# EAGLE board Cellphone-Detector-LM358-Flip-Flop-2X (EAGLE 7.2.0)
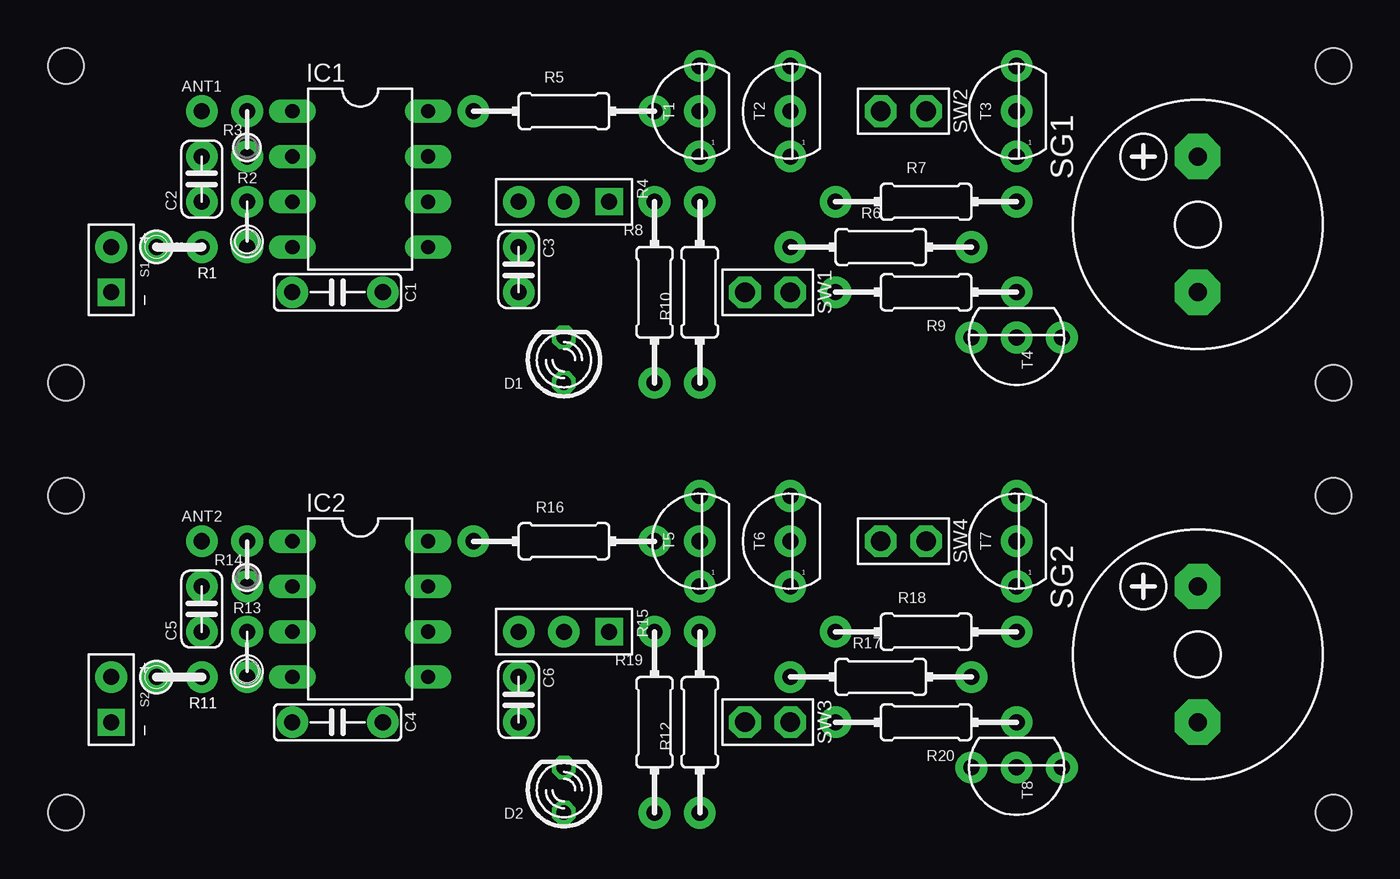
[diagram p0: board, top side]
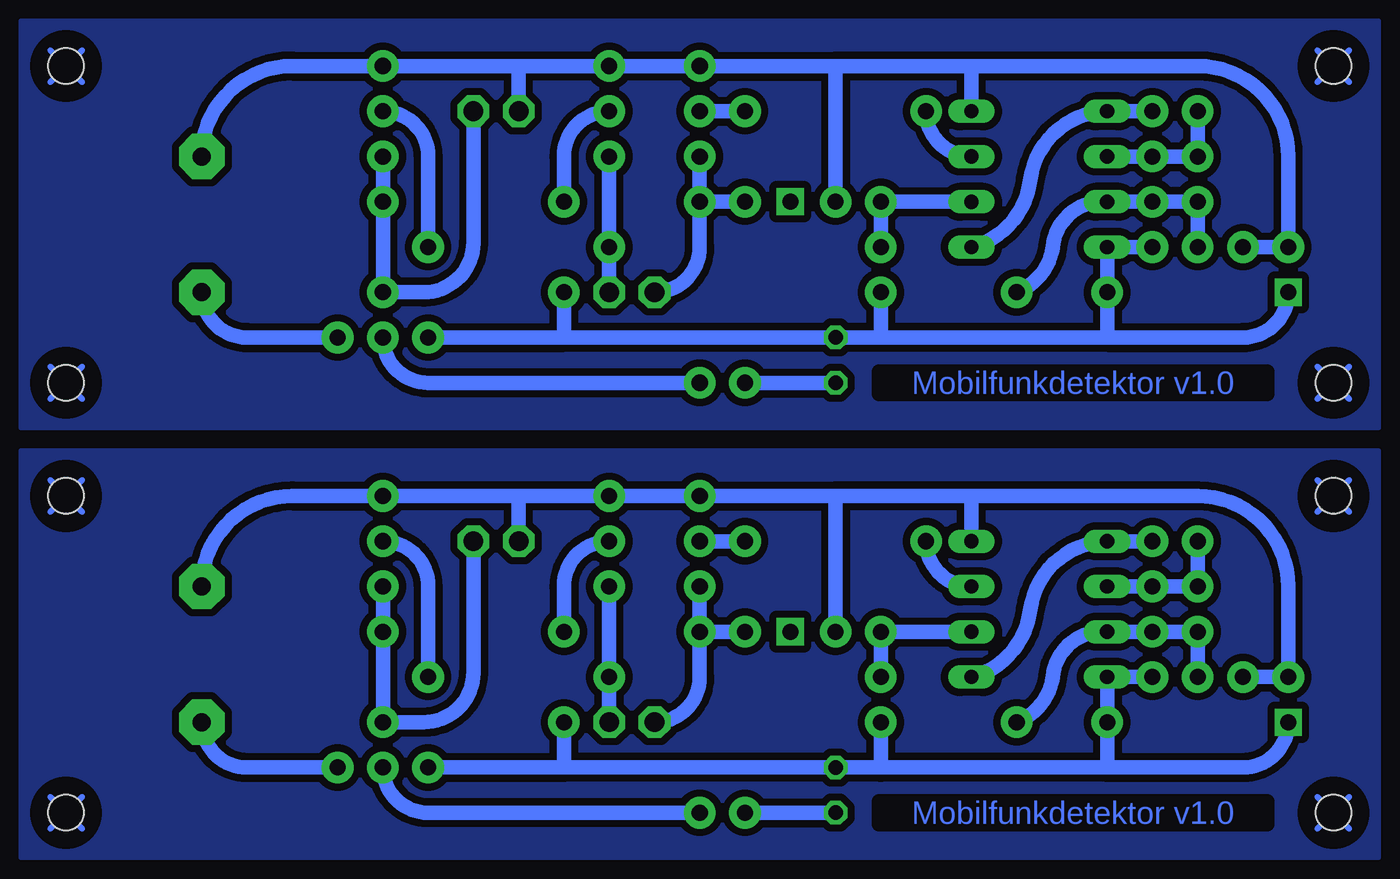
[diagram p1: board, bottom side, seen from below]

No outline drawn. Coordinates in mm, seen from the top.
Copper layers (1*16): Top 0.035mm / dielectric 1.5mm / Bottom 0.035mm
Design rules "default": minimum track width 10mil, minimum drill 24mil, track to track 8mil, track to pad 8mil, pad to pad 8mil, via to via 8mil, smd to smd 8mil, copper to edge 40mil, drill to drill 8mil, minimum pad ring 10mil, minimum via ring 8mil, stop-mask expansion 4mil, vias tented up to drill 0mil, thermal gap 10mil
Net classes: 0 default: clearance 0.406 mm
Holes 2 mm at 2.54,20.32 2.54,2.54 73.66,20.32 73.66,2.54 2.54,-3.81 2.54,-21.59 73.66,-3.81 73.66,-21.59

## Footprints (pad centres in the part's own frame; a part is rotated, then mirrored left to right if it is on the bottom)
SPAD = drill 0.9 pad 1.778: 1 0,0
C050-025X060 = drill 0.9 pad 1.778: 1 0,2.54; 2 0,-2.54
C025-024X044 = drill 0.9 pad 1.778: 1 -1.27,0; 2 1.27,0
LED_3MM/V = drill 0.813 pad 1.27 octagon: A 0,1.27; K 0,-1.27
DIL08 = drill 0.8 pad 1.27 long: 1 -3.81,3.81; 2 -3.81,1.27; 3 -3.81,-1.27; 4 -3.81,-3.81; 5 3.81,-3.81; 6 3.81,-1.27; 7 3.81,1.27; 8 3.81,3.81
0204/2 = drill 0.9 pad 1.778: 1 1.27,0; 2 -1.27,0
0204/2V = drill 0.9 pad 1.778: 1 0,1.27; 2 0,-1.27
0202/2V = drill 0.9 pad 1.778: 1 0,-1.27; 2 0,1.27
CONN-3P = drill 0.9 pad 1.524 square: 1 0,2.54 | drill 0.9 pad 1.778: 2 0,0; 3 0,-2.54
0204/10 = drill 0.9 pad 1.778: 1 -5.08,0; 2 5.08,0
0204/10-V = drill 0.9 pad 1.778: 1 0,5.08; 2 0,-5.08
SPAD+- = drill 0.9 pad 1.524 square: 1 0,-1.27 | drill 0.9 pad 1.778: 2 0,1.27
F/CM12P = drill 1.016 pad 2.54 octagon: + 3.81,0; - -3.81,0
SLSW-1P1T = drill 1.1 pad 1.778 octagon: P 0,0; S 0,-2.54
TO92 = drill 0.9 pad 1.778: 1 0,2.54; 2 0,0; 3 0,-2.54
TO92-CBE = drill 0.9 pad 1.778: 1 0,2.54; 2 0,0; 3 0,-2.54

## Placement (x,y rotation side)
ANT1  ANT  [SPAD]  10.16,17.78 270 top
ANT2  ANT  [SPAD]  10.16,-6.35 270 top
C1  100nF  [C050-025X060]  17.78,7.62 270 top
C2  100nF  [C025-024X044]  10.16,13.97 90 top
C3  100nF  [C025-024X044]  27.94,8.89 270 top
C4  100nF  [C050-025X060]  17.78,-16.51 270 top
C5  100nF  [C025-024X044]  10.16,-10.16 90 top
C6  100nF  [C025-024X044]  27.94,-15.24 270 top
D1  LED rot  [LED_3MM/V]  30.48,3.81 180 top
D2  LED rot  [LED_3MM/V]  30.48,-20.32 180 top
IC1  LM358N  [DIL08]  19.05,13.97 0 top
IC2  LM358N  [DIL08]  19.05,-10.16 0 top
R1  6.8MΩ  [0204/2]  8.89,10.16 180 top
R2  6.8MΩ  [0204/2V]  12.7,11.43 0 top
R3  6.8MΩ  [0202/2V]  12.7,16.51 0 top
R4  470kΩ  [CONN-3P]  30.48,12.7 270 top
R5  10kΩ  [0204/10]  30.48,17.78 0 top
R6  22kΩ  [0204/10]  48.26,10.16 0 top
R7  22kΩ  [0204/10]  50.8,12.7 0 top
R8  470Ω  [0204/10-V]  35.56,7.62 0 top
R9  1kΩ  [0204/10]  50.8,7.62 180 top
R10  10kΩ  [0204/10]  38.1,7.62 90 top
R11  6.8MΩ  [0204/2]  8.89,-13.97 180 top
R12  10kΩ  [0204/10]  38.1,-16.51 90 top
R13  6.8MΩ  [0204/2V]  12.7,-12.7 0 top
R14  6.8MΩ  [0202/2V]  12.7,-7.62 0 top
R15  470kΩ  [CONN-3P]  30.48,-11.43 270 top
R16  10kΩ  [0204/10]  30.48,-6.35 0 top
R17  22kΩ  [0204/10]  48.26,-13.97 0 top
R18  22kΩ  [0204/10]  50.8,-11.43 0 top
R19  470Ω  [0204/10-V]  35.56,-16.51 0 top
R20  1kΩ  [0204/10]  50.8,-16.51 180 top
S1  VCC_GNDR  [SPAD+-]  5.08,8.89 0 top
S2  VCC_GNDR  [SPAD+-]  5.08,-15.24 0 top
SG1  F/CM12P  [F/CM12P]  66.04,11.43 90 top
SG2  F/CM12P  [F/CM12P]  66.04,-12.7 90 top
SW1  SW1  [SLSW-1P1T]  43.18,7.62 270 top
SW2  PB-1P-1T-2P  [SLSW-1P1T]  50.8,17.78 270 top
SW3  SW1  [SLSW-1P1T]  43.18,-16.51 270 top
SW4  PB-1P-1T-2P  [SLSW-1P1T]  50.8,-6.35 270 top
T1  BC327  [TO92]  38.1,17.78 180 top
T2  BC327  [TO92]  43.18,17.78 180 top
T3  BC327  [TO92]  55.88,17.78 180 top
T4  BC337CBE  [TO92-CBE]  55.88,5.08 270 top
T5  BC327  [TO92]  38.1,-6.35 180 top
T6  BC327  [TO92]  43.18,-6.35 180 top
T7  BC327  [TO92]  55.88,-6.35 180 top
T8  BC337CBE  [TO92-CBE]  55.88,-19.05 270 top

## Library data of the parts
ANT1 ANT2 S1 S2 = pad
C1-C6 = c
D1 D2 = d
IC1 IC2 = ic
R1-R20 = r
SG1 SG2 = buzzer; OC_FARNELL: unknown; OC_NEWARK: unknown
SW1-SW4 = sw
T1-T8 = t

## Nets
ANT: ANT1.1 C2.2 IC1.2 R3.1
ANT1: ANT2.1 C5.2 IC2.2 R14.1
GND: C1.2 C3.2 D1.K IC1.4 R2.2 R9.2 S1.1 T4.3
GND1: C4.2 C6.2 D2.K IC2.4 R13.2 R20.2 S2.1 T8.3
N$1: C3.1 IC1.6 R4.3
N$2: SG1.- T4.1
N$3: IC1.7 R5.1
N$4: C1.1 C2.1 IC1.3 R1.2 R2.1
N$5: R7.2 R9.1 SW2.P T3.1
N$6: R6.1 SW1.P T2.1
N$7: R6.2 T3.2
N$8: R10.1 T4.2
N$9: R7.1 T2.2
N$12: D1.A R8.2
N$13: R8.1 R10.2 SW1.S T1.1
N$14: R5.2 T1.2
N$22: C6.1 IC2.6 R15.3
N$23: C4.1 C5.1 IC2.3 R11.2 R13.1
N$24: R17.1 SW3.P T6.1
N$25: R17.2 T7.2
N$26: R18.1 T6.2
N$27: D2.A R19.2
N$28: IC2.7 R16.1
N$29: R16.2 T5.2
N$30: R12.2 R19.1 SW3.S T5.1
N$31: R12.1 T8.2
N$32: SG2.- T8.1
N$33: R18.2 R20.1 SW4.P T7.1
SIG: IC1.1 IC1.5 R3.2
SIG1: IC2.1 IC2.5 R14.2
VCC: IC1.8 R1.1 R4.2 S1.2 SG1.+ SW2.S T1.3 T2.3 T3.3
VCC1: IC2.8 R11.1 R15.2 S2.2 SG2.+ SW4.S T5.3 T6.3 T7.3

## Tracks (layer width: path | path; a pad name or v marks a point on that pad's centre or on a via)
ANT
  Bottom 0.813: IC1.2 R3.1 C2.2 ANT1.1
ANT1
  Bottom 0.813: IC2.2 R14.1 C5.2 ANT2.1
GND
  Bottom 0.813: R2.2 IC1.4 C1.2 15.24,5.08 | 15.24,5.08 27.94,5.08 | 27.94,5.08 C3.2 | 27.94,5.08 D1.K 45.72,5.08 | T4.3 45.72,5.08 | 45.72,5.08 R9.2 | 15.24,5.08 7.62,5.08 arc-90 S1.1
GND1
  Bottom 0.813: R13.2 IC2.4 C4.2 15.24,-19.05 | 15.24,-19.05 27.94,-19.05 | 27.94,-19.05 C6.2 | 27.94,-19.05 D2.K 45.72,-19.05 | T8.3 45.72,-19.05 | 45.72,-19.05 R20.2 | 15.24,-19.05 7.62,-19.05 arc-90 S2.1
N$1
  Bottom 0.813: C3.1 R4.3 IC1.6
N$2
  Bottom 0.813: T4.1 63.5,5.08 arc90 SG1.-
N$3
  Bottom 0.813: IC1.7 arc90 R5.1
N$4
  Bottom 0.813: R1.2 C2.1 R2.1 IC1.3 arc-90 18.29,10.16 arc60 C1.1
N$5
  Bottom 0.813: T3.1 R7.2 R9.1 53.59,7.62 arc-90 50.8,10.41 SW2.P
N$6
  Bottom 0.813: T2.1 SW1.P R6.1
N$7
  Bottom 0.813: R6.2 53.34,15.24 arc-90 T3.2
N$8
  Bottom 0.813: R10.1 53.34,2.54 arc90 T4.2
N$9
  Bottom 0.813: T2.2 arc-90 45.72,15.24 R7.1
N$10
  pour Bottom: 0,22.86 76.2,22.86 76.2,0 0,0
N$11
  Bottom 0.305: 1.64,19.42 3.44,21.22
N$12
  Bottom 0.813: R8.2 D1.A
N$13
  Bottom 0.813: R8.1 R10.2 | R10.2 T1.1 | SW1.S arc-90 38.1,10.16 R10.2
N$14
  Bottom 0.813: T1.2 R5.2
N$15
  Bottom 0.305: 1.64,21.22 3.44,19.42
N$16
  Bottom 0.305: 1.64,1.64 3.44,3.44
N$17
  Bottom 0.305: 1.64,3.44 3.44,1.64
N$18
  Bottom 0.305: 72.76,19.42 74.56,21.22
N$19
  Bottom 0.305: 72.76,21.22 74.56,19.42
N$20
  Bottom 0.305: 72.76,1.64 74.56,3.44
N$21
  Bottom 0.305: 72.76,3.44 74.56,1.64
N$22
  Bottom 0.813: C6.1 R15.3 IC2.6
N$23
  Bottom 0.813: R11.2 C5.1 R13.1 IC2.3 arc-90 18.29,-13.97 arc60 C4.1
N$24
  Bottom 0.813: T6.1 SW3.P R17.1
N$25
  Bottom 0.813: R17.2 53.34,-8.89 arc-90 T7.2
N$26
  Bottom 0.813: T6.2 arc-90 45.72,-8.89 R18.1
N$27
  Bottom 0.813: R19.2 D2.A
N$28
  Bottom 0.813: IC2.7 arc90 R16.1
N$29
  Bottom 0.813: T5.2 R16.2
N$30
  Bottom 0.813: R19.1 R12.2 | R12.2 T5.1 | SW3.S arc-90 38.1,-13.97 R12.2
N$31
  Bottom 0.813: R12.1 53.34,-21.59 arc90 T8.2
N$32
  Bottom 0.813: T8.1 63.5,-19.05 arc90 SG2.-
N$33
  Bottom 0.813: T7.1 R18.2 R20.1 53.59,-16.51 arc-90 50.8,-13.72 SW4.P
N$34
  pour Bottom: 0,-1.27 76.2,-1.27 76.2,-24.13 0,-24.13
N$35
  Bottom 0.305: 1.64,-4.71 3.44,-2.91
N$36
  Bottom 0.305: 1.64,-2.91 3.44,-4.71
N$37
  Bottom 0.305: 1.64,-22.49 3.44,-20.69
N$38
  Bottom 0.305: 1.64,-20.69 3.44,-22.49
N$39
  Bottom 0.305: 72.76,-4.71 74.56,-2.91
N$40
  Bottom 0.305: 72.76,-2.91 74.56,-4.71
N$41
  Bottom 0.305: 72.76,-22.49 74.56,-20.69
N$42
  Bottom 0.305: 72.76,-20.69 74.56,-22.49
SIG
  Bottom 0.813: R3.2 IC1.1 arc-80 19.56,13.97 arc70 IC1.5
SIG1
  Bottom 0.813: R14.2 IC2.1 arc-80 19.56,-10.16 arc70 IC2.5
VCC
  Bottom 0.813: IC1.8 22.86,20.32 | 22.86,20.32 30.48,20.32 | 30.48,20.32 R4.2 | 30.48,20.32 T1.3 T2.3 48.26,20.32 | SW2.S 48.26,20.32 | 48.26,20.32 T3.3 60.96,20.32 arc-90 SG1.+ | R1.1 S1.2 5.08,15.24 arc-90 10.16,20.32 22.86,20.32
VCC1
  Bottom 0.813: IC2.8 22.86,-3.81 | 22.86,-3.81 30.48,-3.81 | 30.48,-3.81 R15.2 | 30.48,-3.81 T5.3 T6.3 48.26,-3.81 | SW4.S 48.26,-3.81 | 48.26,-3.81 T7.3 60.96,-3.81 arc-90 SG2.+ | R11.1 S2.2 5.08,-8.89 arc-90 10.16,-3.81 22.86,-3.81

## Text on the board
Bottom: Mobilfunkdetektor v1.0 | Mobilfunkdetektor v1.0